# EAGLE board rev_i_v166 (EAGLE 9.7.0), part 1 of 2
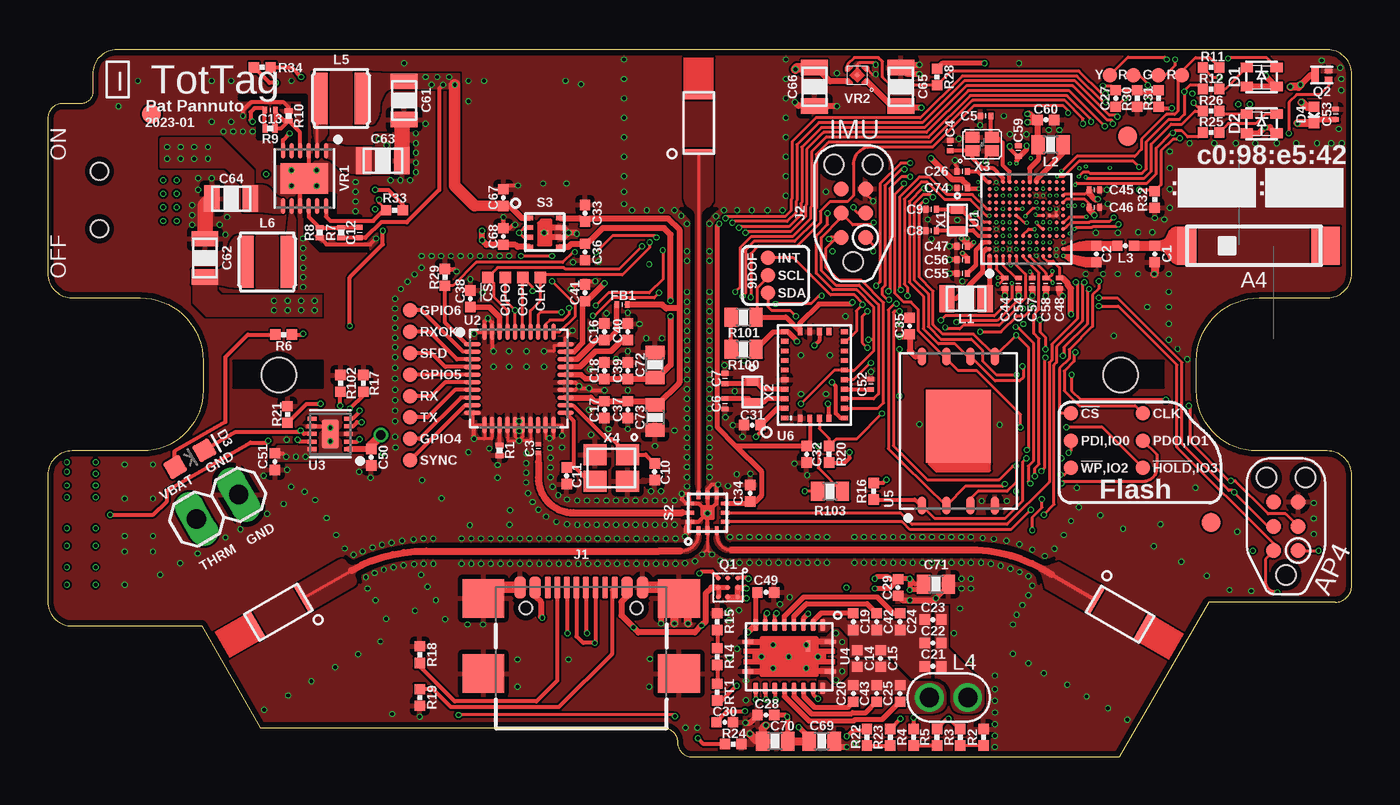
[diagram p0: board, top side]
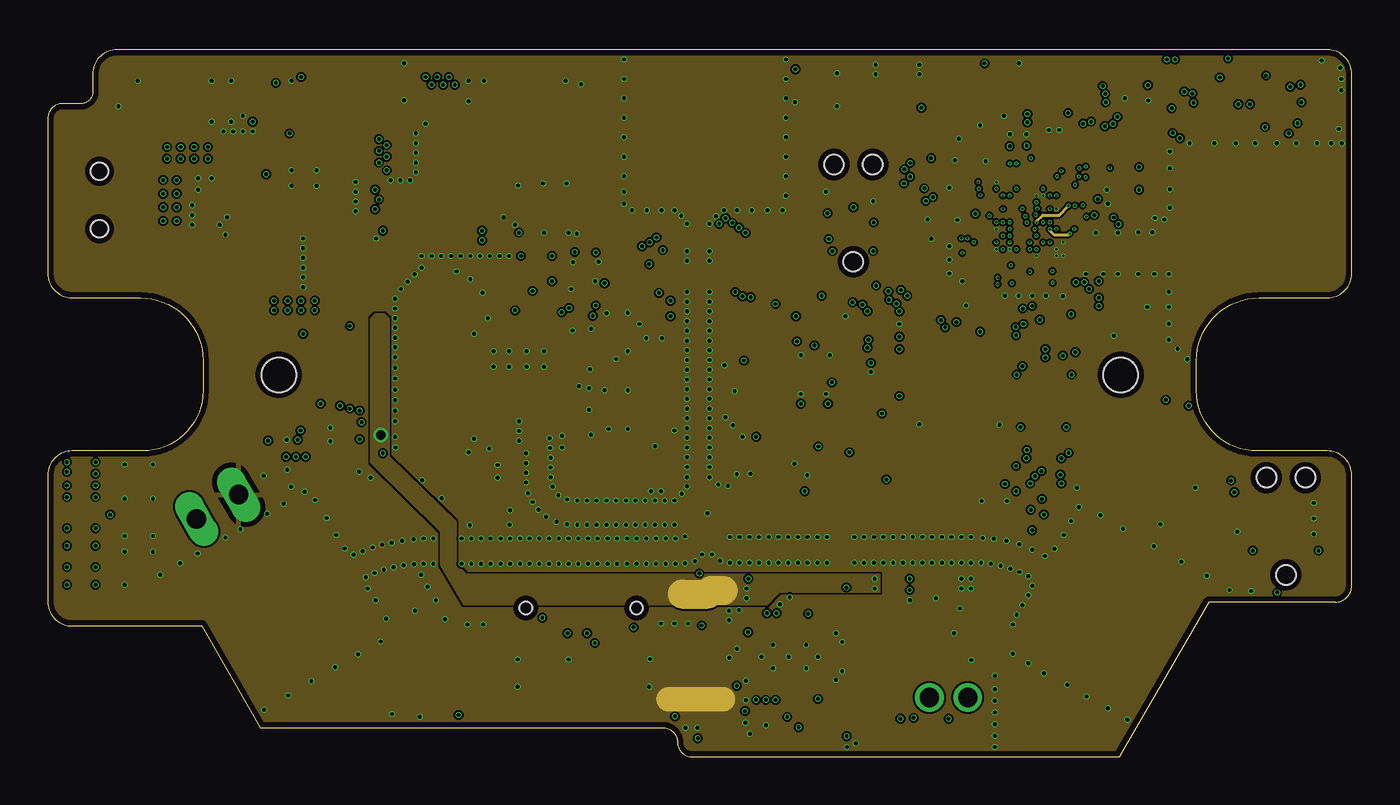
[diagram p1: board, inner layer Route2]
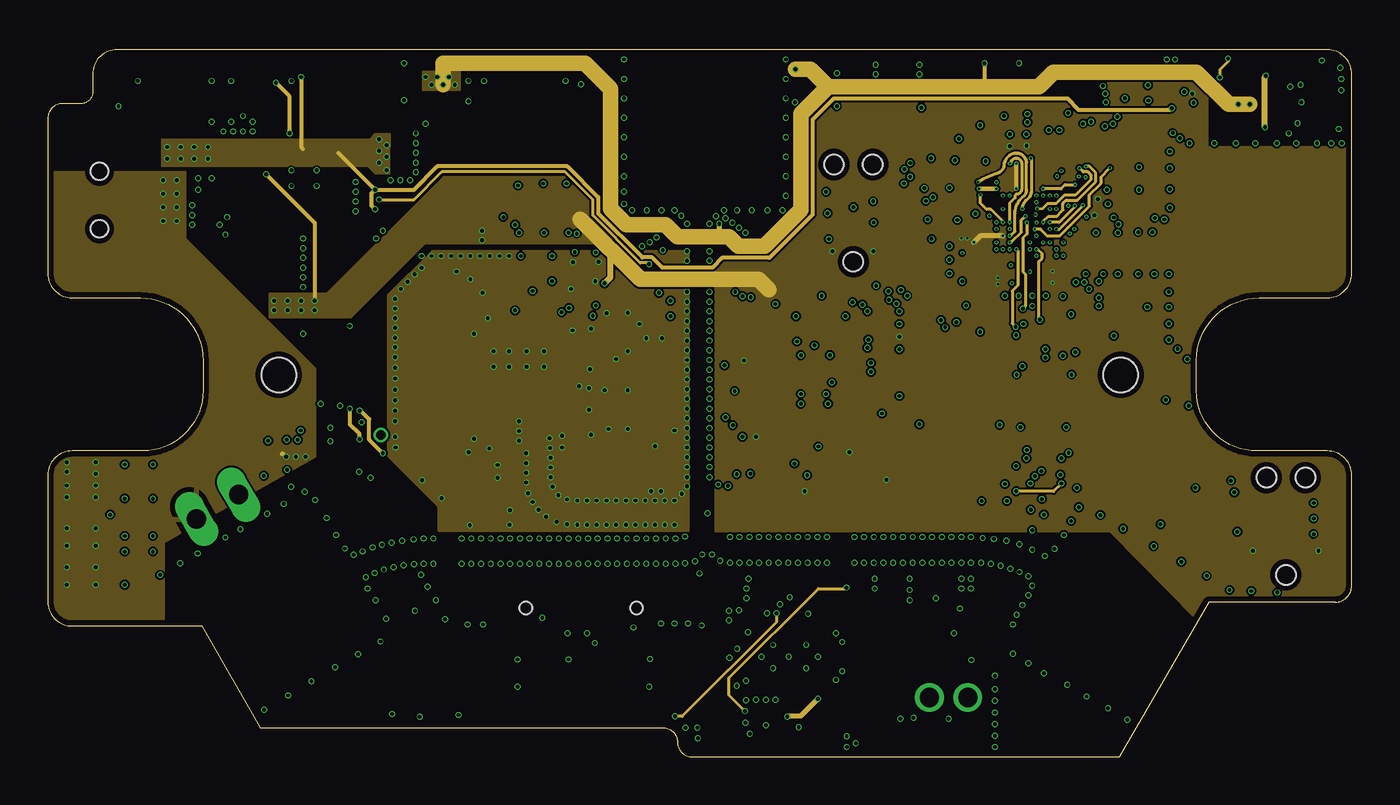
[diagram p2: board, inner layer Route15]
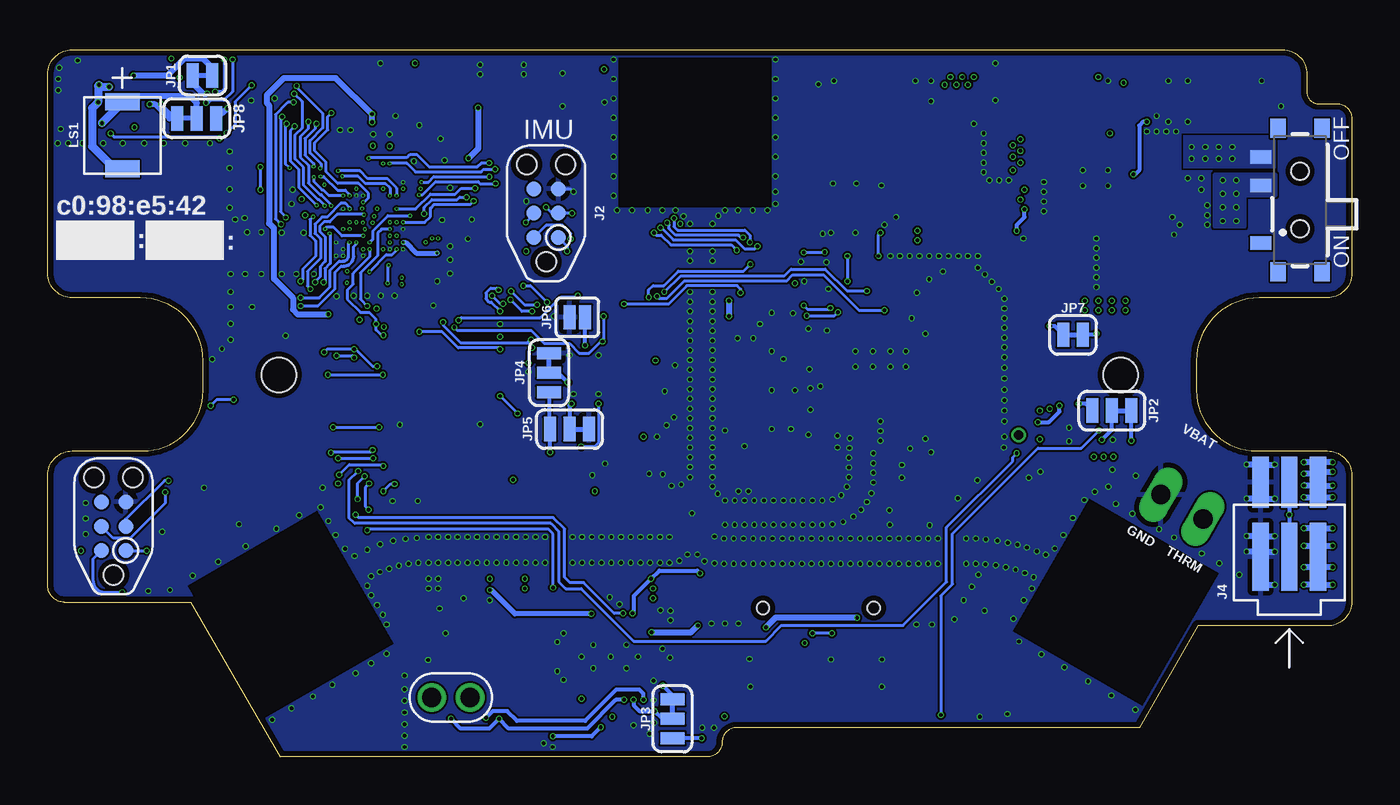
[diagram p3: board, bottom side, seen from below]

Size 68.14 x 36.93 mm. Coordinates in mm from the lower left corner, seen from the top.
Outline: 66.87,36.93 3.61,36.93 arc90 2.34,35.66 2.34,34.7 arc-90 1.76,34.12 0.76,34.12 arc90 0,33.36 0,25.25 arc90 1.27,23.98 4.83,23.98 arc-90 8.11,20.69 8.11,19.14 arc-90 4.95,15.98 1.27,15.98 arc90 0,14.71 0,8.1 arc90 1.27,6.83 8.03,6.83 11.11,1.52 32.14,1.52 arc-90 32.9,0.76 arc90 33.66,0 55.99,0 60.66,8.08 67.29,8.08 arc90 68.14,8.92 68.14,14.71 arc90 66.87,15.98 63.18,15.98 arc-90 60.02,19.14 60.02,20.69 arc-90 63.31,23.98 66.87,23.98 arc90 68.14,25.25 68.14,35.66 arc90 66.87,36.93
Copper layers (1+2*15+16): Top 0.0356mm / dielectric 0.18mm / Route2 0.0356mm / dielectric 1.03mm / Route15 0.0356mm / dielectric 0.18mm / Bottom 0.0356mm
Design rules "quickturn_co_kr_1oz_4lyr *": minimum track width 6mil, minimum drill 4mil, track to track 4mil, track to pad 4mil, pad to pad 4mil, via to via 4mil, smd to smd 4mil, copper to edge 12mil, drill to drill 9mil, minimum pad ring 8mil, minimum via ring 2mil, stop-mask expansion 3mil, vias tented up to drill 50mil, thermal gap 10mil
Holes 1.8 mm at 12.07,19.95 56.07,19.95
tKeepout: area 19.3,9.6 to 32.3,11.7; area 34.3,9.6 to 48.8,11.7; area 33.1,12.4 to 35.1,27.8
tRestrict: area 9.7,19.3 to 14.4,20.7; area 53.8,19.3 to 58.3,20.7; area 34.2,13.5 to 35,28.6; area 33.1,13.5 to 33.7,28.6; area 19.9,11 to 33.7,11.9; area 19.9,10.4 to 34.3,11.6; area 16.1,10.2 to 19.8,11.1; area 15.6,10.1 to 16,10.5; area 16.2,9.1 to 19.8,10.5; area 34.6,10.4 to 35.6,11.5; area 35.2,11.1 to 35.6,12; area 35.7,11 to 48.4,11.2; 7 more areas

## Footprints (pad centres in the part's own frame; a part is rotated, then mirrored left to right if it is on the bottom)
ACR0301U = smd 1.57 x 0.3: FEED 3.685,2.89; STRUCT-NC 3.685,5.79
AMCA72-2R470G-S1F-T = smd 2 x 1.5: NC 0,3.75 | smd 2 x 1: S1 0,-3.5
0402_CAP = smd 0.536 x 0.546: 1 -0.433,0; 2 0.433,0
0201_CAP = smd 0.3 x 0.21: P$1 0,0.22; P$2 0,-0.22
0201_CAP' = smd 0.25 x 0.35: P$1 -0.275,0; P$2 0.275,0
0805_CAP = smd 0.8 x 1.4: P$1 1,0; P$2 -1,0
0603_CAP = smd 0.7 x 1: 1 -0.65,0; 2 0.65,0
LED-0606 = smd 0.65 x 0.5: 1-C1 0.775,0.5; 2-C2 -0.775,0.5; 3-A1 0.775,-0.5; 4-A2 -0.775,-0.5
LED-0603 = smd 1 x 1: A -0.877,0; C 0.877,0
0402_DIODE = smd 0.536 x 0.546: ANODE -0.433,0; CATHODE 0.433,0
0201_FB = smd 0.25 x 0.35: P$1 -0.275,0; P$2 0.275,0
FIDUCIAL-1X2 = smd 1 x 1: 1 0,0
GCT_USB4110-GF-A = smd 0.6 x 1.15: A1/B12 -3.2,1.075; A4/B9 -2.4,1.075; B1/A12 3.2,1.075; B4/A9 2.4,1.075 | smd 0.3 x 1.15: A5 -1.25,1.075; A6 -0.25,1.075; A7 0.25,1.075; A8 1.25,1.075; B5 1.75,1.075; B6 0.75,1.075; B7 -0.75,1.075; B8 -1.75,1.075 | smd 2.18 x 2: S1 -5.11,0.5; S2 5.11,0.5; S3 -5.11,-3.43; S4 5.11,-3.43 | hole 0.65: -2.89,0; 2.89,0
TC2030-IDC-NL-2SIDE = smd 0.787 x 0.787: 1 -1.27,-0.635; 2 -1.27,0.635; 3 0,-0.635; 4 0,0.635; 5 1.27,-0.635; 6 1.27,0.635 | smd 0.787 x 0.787 bottom: B1 -1.27,0.635; B2 -1.27,-0.635; B3 0,0.635; B4 0,-0.635; B5 1.27,0.635; B6 1.27,-0.635 | hole 1.016: -2.54,0; 2.54,1.016; 2.54,-1.016
MOLEX-PICO-SPOX-3_SIDE = smd 3.55 x 0.85: 1 -1.725,1.5; 2 -1.725,0; 3 -1.725,-1.5 | smd 2.65 x 0.85: 1SUPP 2.175,1.5; 2SUPP 2.175,0; 3SUPP 2.175,-1.5
SMT-JUMPER_2_NC_TRACE_SILK = smd 0.635 x 1.27: 1 -0.508,0; 2 0.508,0
SMT-JUMPER_3_1-NC_TRACE_SILK = smd 0.635 x 1.27: 1 -1.016,0; 2 0,0; 3 1.016,0
SMT-JUMPER_2_NO_SILK = smd 0.635 x 1.27: 1 -0.406,0; 2 0.406,0
1X02 = drill 1.016 long: 1 -1.27,0; 2 1.27,0
WURTH_COIL_760308103204 = drill 1: P$1 0,1; P$2 0,-1
NRX3015 = smd 0.8 x 2.7: P$1 -1.1,0; P$2 1.1,0
SMT-0440-T-2-R = smd 0.9 x 1.8: + 1.75,0; - -1.75,0
DSBGA = smd 0.25 x 0.25: A1 -0.5,0.5; A2 0,0.5; A3 0.5,0.5; B1 -0.5,0; B2 0,0; B3 0.5,0; C1 -0.5,-0.5; C2 0,-0.5; C3 0.5,-0.5
XFDFN-3 = smd 0.4 x 0.7: D 0.35,0 | smd 0.4 x 0.25: G -0.35,0.215; S -0.35,-0.215
0201_RES = smd 0.28 x 0.43: 1 -0.255,0; 2 0.255,0
0402_RES = smd 0.536 x 0.546: 1 -0.433,0; 2 0.433,0
0603-RES = smd 0.7 x 1: 1 -0.65,0; 2 0.65,0
450404015514 = smd 0.7 x 1.1: 1 2.25,-2.05; 2 -0.75,-2.05; 3 -2.25,-2.05 | smd 1 x 0.8: Z1 -3.75,1.15; Z2 3.75,1.15; Z3 3.75,-1.15; Z4 -3.75,-1.15 | hole 0.9: -1.5,0; 1.5,0
SKY13373 = smd 0.44 x 0.2: 1 -0.93,0.48; 2 -0.93,0; 3 -0.93,-0.48; 7 0.93,-0.48; 8 0.93,0; 9 0.93,0.48 | smd 0.2 x 0.44: 4 -0.48,-0.93; 5 0,-0.93; 6 0.48,-0.93; 10 0.48,0.93; 11 0,0.93; 12 -0.48,0.93; PAD 0,0
TDFN2X2X0P6-8 = smd 0.4 x 0.24: 1 -0.8,0.75; 2 -0.8,0.25; 3 -0.8,-0.25; 4 -0.8,-0.75; 5 0.8,-0.75; 6 0.8,-0.25; 7 0.8,0.25; 8 0.8,0.75; PAD 0,0
PAD.03X.03 = smd 0.762 x 0.762: P$1 0,0
TP06SQ = smd 0.6 x 0.6: TP 0,0
APOLLO4_BLUE_SOC_BGA = smd 0.2 x 0.2: A1 -1.925,1.925; A2 -1.575,1.925; A3 -1.225,1.925; A4 -0.875,1.925; A5 -0.525,1.925; A6 -0.175,1.925; A7 0.175,1.925; A8 0.525,1.925; A9 0.875,1.925; A10 1.225,1.925; A11 1.575,1.925; A12 1.925,1.925; B1 -1.925,1.575; B2 -1.575,1.575; B3 -1.225,1.575; B4 -0.875,1.575; B5 -0.525,1.575; B6 -0.175,1.575; B7 0.175,1.575; B8 0.525,1.575; B9 0.875,1.575; B10 1.225,1.575; B11 1.575,1.575; B12 1.925,1.575; C1 -1.925,1.225; C2 -1.575,1.225; C3 -1.225,1.225; C4 -0.875,1.225; C5 -0.525,1.225; C6 -0.175,1.225; C7 0.175,1.225; C8 0.525,1.225; C9 0.875,1.225; C10 1.225,1.225; C11 1.575,1.225; C12 1.925,1.225; D1 -1.925,0.875; D2 -1.575,0.875; D3 -1.225,0.875; D4 -0.875,0.875; D5 -0.525,0.875; D6 -0.175,0.875; D7 0.175,0.875; D8 0.525,0.875; D9 0.875,0.875; D10 1.225,0.875; D11 1.575,0.875; D12 1.925,0.875; E1 -1.925,0.525; E2 -1.575,0.525; E3 -1.225,0.525; E4 -0.875,0.525; E5 -0.525,0.525; E6 -0.175,0.525; E7 0.175,0.525; E8 0.525,0.525; E9 0.875,0.525; E10 1.225,0.525; E11 1.575,0.525; E12 1.925,0.525; F1 -1.925,0.175; F2 -1.575,0.175; F3 -1.225,0.175; F4 -0.875,0.175; F9 0.875,0.175; F10 1.225,0.175; F11 1.575,0.175; F12 1.925,0.175; G1 -1.925,-0.175; G2 -1.575,-0.175; G3 -1.225,-0.175; G4 -0.875,-0.175; G9 0.875,-0.175; G10 1.225,-0.175; G11 1.575,-0.175; G12 1.925,-0.175; H1 -1.925,-0.525; H2 -1.575,-0.525; H3 -1.225,-0.525; H4 -0.875,-0.525; H9 0.875,-0.525; H10 1.225,-0.525; H11 1.575,-0.525; H12 1.925,-0.525; J1 -1.925,-0.875; J2 -1.575,-0.875; J3 -1.225,-0.875; J4 -0.875,-0.875; J5 -0.525,-0.875; J6 -0.175,-0.875; J7 0.175,-0.875; J8 0.525,-0.875; J9 0.875,-0.875; J10 1.225,-0.875; J11 1.575,-0.875; J12 1.925,-0.875; K1 -1.925,-1.225; K2 -1.575,-1.225; K3 -1.225,-1.225; K4 -0.875,-1.225; K5 -0.525,-1.225; K6 -0.175,-1.225; K7 0.175,-1.225; K8 0.525,-1.225; K9 0.875,-1.225; K10 1.225,-1.225; K11 1.575,-1.225; K12 1.925,-1.225; L1 -1.925,-1.575; L2 -1.575,-1.575; L4 -0.875,-1.575; L5 -0.525,-1.575; L6 -0.175,-1.575; L7 0.175,-1.575; L8 0.525,-1.575; L9 0.875,-1.575; L10 1.225,-1.575; L11 1.575,-1.575; L12 1.925,-1.575; M1 -1.925,-1.925; M2 -1.575,-1.925; M3 -1.225,-1.925; M4 -0.875,-1.925; M5 -0.525,-1.925; M6 -0.175,-1.925; M7 0.175,-1.925; M8 0.525,-1.925; M9 0.875,-1.925; M10 1.225,-1.925; M11 1.575,-1.925; M12 1.925,-1.925
QFN40P500X500X80-40N = smd 0.862 x 0.224: 1 -2.435,1.8; 2 -2.435,1.4; 3 -2.435,1; 4 -2.435,0.6; 5 -2.435,0.2; 6 -2.435,-0.2; 7 -2.435,-0.6; 8 -2.435,-1; 9 -2.435,-1.4; 10 -2.435,-1.8; 21 2.435,-1.8; 22 2.435,-1.4; 23 2.435,-1; 24 2.435,-0.6; 25 2.435,-0.2; 26 2.435,0.2; 27 2.435,0.6; 28 2.435,1; 29 2.435,1.4; 30 2.435,1.8 | smd 0.224 x 0.862: 11 -1.8,-2.435; 12 -1.4,-2.435; 13 -1,-2.435; 14 -0.6,-2.435; 15 -0.2,-2.435; 16 0.2,-2.435; 17 0.6,-2.435; 18 1,-2.435; 19 1.4,-2.435; 20 1.8,-2.435; 31 1.8,2.435; 32 1.4,2.435; 33 1,2.435; 34 0.6,2.435; 35 0.2,2.435; 36 -0.2,2.435; 37 -0.6,2.435; 38 -1,2.435; 39 -1.4,2.435; 40 -1.8,2.435
DSQ0010A = smd 0.5 x 0.2: 1 -0.95,0.8; 2 -0.95,0.4; 3 -0.95,0; 4 -0.95,-0.4; 5 -0.95,-0.8; 6 0.95,-0.8; 7 0.95,-0.4; 8 0.95,0; 9 0.95,0.4; 10 0.95,0.8 | smd 0.9 x 1.5: PAD 0,0
RHL0020A = smd 0.24 x 0.6: 1 -0.775,2.15; 10 -0.775,-2.15; 11 0.775,-2.15; 20 0.775,2.15 | smd 0.6 x 0.24: 2 -1.65,1.75; 3 -1.65,1.25; 4 -1.65,0.75; 5 -1.65,0.25; 6 -1.65,-0.25; 7 -1.65,-0.75; 8 -1.65,-1.25; 9 -1.65,-1.75; 12 1.65,-1.75; 13 1.65,-1.25; 14 1.65,-0.75; 15 1.65,-0.25; 16 1.65,0.25; 17 1.65,0.75; 18 1.65,1.25; 19 1.65,1.75; PAD -0.55,1
WSON127P800X600X80-9T430X340N = smd 0.94 x 0.445: 1 -3.896,1.905; 2 -3.896,0.635; 3 -3.896,-0.635; 4 -3.896,-1.905; 5 3.896,-1.905; 6 3.896,-0.635; 7 3.896,0.635; 8 3.896,1.905 | smd 3.8 x 3.4: PAD 0.25,0
LGA28R0P510X4_5P2X3P8X1 = smd 0.25 x 0.375: 1 -2.25,1.562; 6 -2.25,-1.562; 7 -1.75,-1.562; 8 -1.25,-1.562; 9 -0.75,-1.562; 10 -0.25,-1.562; 11 0.25,-1.562; 12 0.75,-1.562; 13 1.25,-1.562; 14 1.75,-1.562; 15 2.25,-1.562; 20 2.25,1.562; 21 1.75,1.562; 22 1.25,1.562; 23 0.75,1.562; 24 0.25,1.562; 25 -0.25,1.562; 26 -0.75,1.562; 27 -1.25,1.562; 28 -1.75,1.562 | smd 0.375 x 0.25: 2 -2.263,0.75; 3 -2.263,0.25; 4 -2.263,-0.25; 5 -2.263,-0.75; 16 2.263,-0.75; 17 2.263,-0.25; 18 2.263,0.25; 19 2.263,0.75
SON45P300X300X80-13T160X250N = smd 0.813 x 0.224: 1 -1.445,1.125; 2 -1.445,0.675; 3 -1.445,0.225; 4 -1.445,-0.225; 5 -1.445,-0.675; 6 -1.445,-1.125; 7 1.445,-1.125; 8 1.445,-0.675; 9 1.445,-0.225; 10 1.445,0.225; 11 1.445,0.675; 12 1.445,1.125 | smd 1.6 x 2.5: 13 0,0
4-XDFN-EP = smd 0.21 x 0.21: 1 -0.505,0.325; 2 -0.505,-0.325; 3 0.505,-0.325; 4 0.505,0.325 | smd 0.2 x 0.2 rotated 45: PAD 0,0
TXC-9HT12 = smd 0.4 x 0.6: 1 -0.53,0 | smd 0.4 x 0.86: 2 0.53,0
ABM12W = smd 0.73 x 0.58: 1 -0.5,-0.35; 2 0.5,-0.35; 3 0.5,0.35; 4 -0.5,0.35
FA-20H = smd 1.1 x 1.2: 1 -0.7,0.85; 2 -0.7,-0.85; 3 0.7,-0.85; 4 0.7,0.85

## Placement (x,y rotation side)
A1  ACR0301U  [ACR0301U]  30.32,28.71 0 top
A2  ACR0301U  [ACR0301U]  54.07,12.84 240 top
A3  ACR0301U  [ACR0301U]  17.71,6.55 120 top
A4  AMCA72-2R47G-S1F-T  [AMCA72-2R470G-S1F-T]  63.02,26.7 270 top
C1  0.5pF  [0402_CAP]  57.84,26.26 270 top
C2  0.8pF  [0402_CAP]  54.79,26.26 270 top
C3  2pF  [0201_CAP]  25.64,16.1 0 top
C4  4pF  [0201_CAP']  47.15,31.93 90 top
C5  4pF  [0201_CAP']  49,33.48 180 top
C6  4pF  [0201_CAP']  35.39,18.44 90 top
C7  4pF  [0201_CAP']  35.39,19.76 270 top
C8  6pF  [0201_CAP']  46.16,27.48 180 top
C9  6pF  [0201_CAP']  46.16,28.6 180 top
C10  12pF  [0402_CAP]  31.71,14.88 270 top
C11  12pF  [0402_CAP]  27.11,14.68 270 top
C12  22pF  [0201_CAP']  16.29,27.38 90 top
C13  22pF  [0201_CAP']  11.61,33.78 180 top
C14  470pF  [0402_CAP]  42.3,5.13 270 top
C15  470pF  [0402_CAP]  43.52,5.13 270 top
C16  4.7nF  [0402_CAP]  29.09,22.2 90 top
C17  4.7nF  [0402_CAP]  29.09,18.14 270 top
C18  4.7nF  [0402_CAP]  29.09,20.17 90 top
C19  10nF  [0402_CAP]  42.09,7.06 270 top
C20  10nF  [0402_CAP]  42.09,3.3 90 top
C21  22nF  [0402_CAP]  46.26,4.72 0 top
C22  22nF  [0402_CAP]  46.26,5.94 0 top
C23  22nF  [0402_CAP]  46.26,7.16 0 top
C24  22nF  [0402_CAP]  44.53,7.06 270 top
C25  22nF  [0402_CAP]  44.53,3.3 90 top
C26  0.1uF  [0201_CAP']  47.78,30.58 180 top
C27  0.1uF  [0402_CAP]  55.81,34.39 270 top
C28  0.1uF  [0402_CAP]  37.52,2.18 180 top
C29  0.1uF  [0402_CAP]  44.43,8.84 270 top
C30  0.1uF  [0402_CAP]  35.38,1.8 0 top
C31  0.1uF  [0402_CAP]  36.81,17.32 180 top
C32  0.1uF  [0402_CAP]  39.66,15.8 270 top
C33  0.1uF  [0402_CAP]  28.07,28.4 90 top
C34  0.1uF  [0402_CAP]  36.71,13.77 90 top
C35  0.1uF  [0402_CAP]  45.04,22.5 90 top
C36  0.1uF  [0402_CAP]  28.07,26.37 270 top
C37  0.1uF  [0402_CAP]  30.31,18.14 270 top
C38  0.1uF  [0402_CAP]  22.08,23.93 90 top
C39  0.1uF  [0402_CAP]  30.31,20.17 90 top
C40  0.22uF  [0402_CAP]  30.31,22.2 90 top
C41  0.22uF  [0402_CAP]  28.07,24.23 90 top
C42  0.47uF  [0402_CAP]  43.31,7.06 270 top
C43  0.47uF  [0402_CAP]  43.31,3.3 90 top
C44  1uF  [0201_CAP']  50.02,24.74 270 top
C45  1uF  [0201_CAP']  54.69,29.62 0 top
C46  1uF  [0201_CAP']  54.69,28.7 0 top
C47  1uF  [0201_CAP']  47.78,26.67 180 top
C48  1uF  [0201_CAP']  52.86,24.74 270 top
C49  1uF  [0402_CAP]  37.52,8.59 180 top
C50  1uF  [0402_CAP]  16.9,15.65 270 top
C51  1uF  [0402_CAP]  11.87,15.42 270 top
C52  1uF  [0201_CAP']  43.01,19.46 90 top
C53  1uF  [0201_CAP']  67.3,33.56 90 top
C54  2.2uF  [0201_CAP']  50.73,24.74 270 top
C55  2.2uF  [0201_CAP']  47.78,25.25 180 top
C56  2.2uF  [0201_CAP']  47.78,25.96 180 top
C57  2.2uF  [0201_CAP']  51.44,24.74 270 top
C58  2.2uF  [0201_CAP']  52.15,24.74 270 top
C59  2.2uF  [0201_CAP']  50.72,31.65 90 top
C60  4.7uF  [0402_CAP]  52.15,33.27 0 top
C61  4.7uF  [0805_CAP]  18.62,34.29 270 top
C62  4.7uF  [0805_CAP]  8.21,26.06 270 top
C63  4.7uF  [0805_CAP]  17.51,31.14 180 top
C64  4.7uF  [0805_CAP]  9.58,29.16 180 top
C65  4.7uF  [0805_CAP]  44.58,35 270 top
C66  4.7uF  [0805_CAP]  40.06,35 90 top
C67  4.7uF  [0402_CAP]  23.81,29.21 270 top
C68  4.7uF  [0402_CAP]  23.81,27.18 270 top
C69  10uF  [0603_CAP]  40.44,0.81 0 top
C70  10uF  [0603_CAP]  38,0.81 180 top
C71  10uF  [0603_CAP]  46.41,9.02 0 top
C72  10uF  [0603_CAP]  31.73,20.47 90 top
C73  10uF  [0603_CAP]  31.73,17.73 270 top
C74  1uF  [0201_CAP']  47.78,29.72 180 top
D1  BICOLOR-SMD  [LED-0606]  63.43,35.51 0 top
D2  BICOLOR-SMD  [LED-0606]  63.43,33.07 0 top
D3  GREEN  [LED-0603]  7.42,15.58 30 top
D4  DIODE0402  [0402_DIODE]  66.17,33.53 270 top
FB1  BLM03PG330SN1D  [0201_FB]  30,23.62 180 top
FD1  FIDUCIAL1X2  [FIDUCIAL-1X2]  5.42,33.58 0 top
FD2  FIDUCIAL1X2  [FIDUCIAL-1X2]  56.44,32.42 0 top
FD3  FIDUCIAL1X2  [FIDUCIAL-1X2]  60.79,12.24 0 top
J1  USB4110-GF-A  [GCT_USB4110-GF-A]  27.87,7.77 0 top
J2  TC2030-JLINK-NL-2SIDE  [TC2030-IDC-NL-2SIDE]  42.09,28.4 90 top
J3  TC2030-JLINK-NL-2SIDE  [TC2030-IDC-NL-2SIDE]  64.7,12.04 90 top
J4  MOLEX-PICO-SPOX-3SIDE  [MOLEX-PICO-SPOX-3_SIDE]  3.26,12.17 90 bottom
JP1  JUMPER-SMT_2_NC_TRACE_SILK  [SMT-JUMPER_2_NC_TRACE_SILK]  60.05,35.59 180 bottom
JP2  JUMPER-SMT_3_1-NC_TRACE_SILK  [SMT-JUMPER_3_1-NC_TRACE_SILK]  12.53,18.08 0 bottom
JP3  JUMPER-SMT_3_1-NC_TRACE_SILK  [SMT-JUMPER_3_1-NC_TRACE_SILK]  35.49,1.98 90 bottom
JP4  JUMPER-SMT_3_1-NC_TRACE_SILK  [SMT-JUMPER_3_1-NC_TRACE_SILK]  41.94,20.07 90 bottom
JP5  JUMPER-SMT_3_1-NC_TRACE_SILK  [SMT-JUMPER_3_1-NC_TRACE_SILK]  40.88,17.12 0 bottom
JP6  JUMPER-SMT_2_NO_SILK  [SMT-JUMPER_2_NO_SILK]  40.47,22.96 0 bottom
JP7  JUMPER-SMT_2_NC_TRACE_SILK  [SMT-JUMPER_2_NC_TRACE_SILK]  14.56,22.05 0 bottom
JP8  JUMPER-SMT_3_1-NC_TRACE_SILK  [SMT-JUMPER_3_1-NC_TRACE_SILK]  60.36,33.35 180 bottom
JP9  [1X02]  8.87,13.06 30 top
L1  2.2µH  [0805_CAP]  47.99,23.93 0 top
L2  1.0µH  [0603_CAP]  52.41,31.98 180 top
L3  4.7nH  [0402_CAP]  56.32,26.7 180 top
L4  WURTH_COIL_760308103204  [WURTH_COIL_760308103204]  47.07,3.1 270 top
L5  10uH  [NRX3015]  15.32,34.39 0 top
L6  10uH  [NRX3015]  11.46,25.86 0 top
LS1  PUI_SMT-0440-T-2-R  [SMT-0440-T-2-R]  64.24,32.46 90 bottom
Q1  CSD75207W15  [DSBGA]  35.54,8.84 270 top
Q2  MOSFET-NCHANNELXFDN-3  [XFDFN-3]  66.58,35.61 180 top
R1  49.9-1%  [0201_RES]  23.6,16 270 top
R2  97.6  [0402_RES]  48.9,1.02 90 top
R3  97.6  [0402_RES]  47.68,1.02 270 top
R4  162  [0402_RES]  45.24,1.02 270 top
R5  162  [0402_RES]  46.46,1.02 90 top
R6  1k  [0402_RES]  12.33,22.05 180 top
R7  845k  [0201_RES]  15.32,27.38 270 top
R8  422k  [0201_RES]  14.21,27.38 90 top
R9  845k  [0201_RES]  11.61,32.82 0 top
R10  261k  [0201_RES]  12.58,33.48 270 top
R11  15  [0402_RES]  60.79,36.02 0 top
R12  5.1  [0402_RES]  60.79,34.87 180 top
R14  1k  [0402_RES]  34.98,5.23 270 top
R15  1k  [0402_RES]  34.98,7.06 270 top
R16  10k  [0402_RES]  43.16,13.87 90 top
R17  2.2k  [0402_RES]  16.49,19.51 270 top
R18  5.1k  [0402_RES]  19.44,5.33 90 top
R19  5.1k  [0402_RES]  19.44,3.1 270 top
R20  10k  [0402_RES]  40.82,15.8 270 top
R21  10k  [0402_RES]  12.53,17.88 270 top
R22  10k  [0402_RES]  42.81,1.02 270 top
R23  10k  [0402_RES]  44.02,1.02 90 top
R24  10k  [0402_RES]  35.82,0.66 180 top
R25  15  [0402_RES]  60.79,32.61 180 top
R26  5.1  [0402_RES]  60.79,33.73 180 top
R28  100k  [0402_RES]  46.46,35.51 270 top
R29  100k  [0402_RES]  20.76,25.04 270 top
R30  3.3M  [0402_RES]  56.93,34.39 90 top
R31  5.1M  [0402_RES]  58.05,34.39 270 top
R32  100k  [0402_RES]  57.84,29.11 270 top
R33  5.1M  [0402_RES]  18.12,28.55 180 top
R34  5.1M  [0402_RES]  11.21,36.02 180 top
R100  DNP  [0603-RES]  36.35,21.29 0 top
R101  DNP  [0603-RES]  36.35,22.96 0 top
R102  DNP  [0402_RES]  15.3,19.51 270 top
R103  DNP  [0603-RES]  40.88,13.87 180 top
RT1  10k@25C  [0402_RES]  34.98,3.38 270 top
S1  [450404015514]  2.7,29.08 270 bottom
S2  SKY13373  [SKY13373]  34.47,12.75 90 top
S3  SIP3241XSIP32414  [TDFN2X2X0P6-8]  25.96,27.39 0 top
TP0  TEST-POINT  [PAD.03X.03]  18.93,22.2 0 top
TP1  TEST-POINT  [PAD.03X.03]  18.93,21.08 0 top
TP2  TEST-POINT  [PAD.03X.03]  18.93,18.82 0 top
TP3  TEST-POINT  [PAD.03X.03]  18.93,17.73 0 top
TP4  TEST-POINT  [PAD.03X.03]  18.93,16.61 0 top
TP5  TEST-POINT  [PAD.03X.03]  18.93,19.96 0 top
TP6  TEST-POINT  [PAD.03X.03]  18.93,23.32 0 top
TP7  TEST-POINT  [PAD.03X.03]  18.93,15.49 0 top
TP8  TEST-POINT  [PAD.03X.03]  53.47,17.93 0 top
TP9  TEST-POINT  [PAD.03X.03]  57.23,17.93 0 top
TP10  TEST-POINT  [PAD.03X.03]  58.05,35.61 0 top
TP11  TEST-POINT  [PAD.03X.03]  56.72,35.61 0 top
TP12  TEST-POINT  [PAD.03X.03]  55.51,35.61 0 top
TP13  TEST-POINT  [PAD.03X.03]  53.47,16.51 0 top
TP14  TEST-POINT  [PAD.03X.03]  57.23,16.51 0 top
TP15  TEST-POINT  [PAD.03X.03]  53.47,15.09 0 top
TP16  TEST-POINT  [PAD.03X.03]  57.23,15.09 0 top
TP17  TEST-POINT  [PAD.03X.03]  37.62,26.06 0 top
TP18  TEST-POINT  [PAD.03X.03]  37.62,25.15 0 top
TP19  TEST-POINT  [PAD.03X.03]  37.62,24.23 0 top
TP20  TEST-POINT  [PAD.03X.03]  59.26,35.61 0 top
TP_DW_CIPO  TPTP06SQ  [TP06SQ]  23.91,25.04 0 top
TP_DW_COPI  TPTP06SQ  [TP06SQ]  24.82,25.04 0 top
TP_DW_SPI_CLK  TPTP06SQ  [TP06SQ]  25.74,25.04 0 top
TP_DW_SPI_CS  TPTP06SQ  [TP06SQ]  22.99,25.04 0 top
U1  APOLLO4_BLUE_SOC_BGA  [APOLLO4_BLUE_SOC_BGA]  51.14,28.09 90 top
U2  DW3210  [QFN40P500X500X80-40N]  24.62,19.76 0 top
U3  BQ24040  [DSQ0010A]  14.76,16.87 180 top
U4  BQ51013B  [RHL0020A]  38.74,5.23 270 top
U5  W25N01GWZEIG  [WSON127P800X600X80-9T430X340N]  47.58,17.02 90 top
U6  BNO055  [LGA28R0P510X4_5P2X3P8X1]  40.07,19.95 90 top
VR1  RT8020RT8020GQW  [SON45P300X300X80-13T160X250N]  13.41,30.21 270 top
VR2  TPS7A0218PDQNR  [4-XDFN-EP]  42.3,35.61 180 top
X1  TXC-9HT12  [TXC-9HT12]  47.53,28.04 270 top
X2  TXC-9HT12  [TXC-9HT12]  36.81,19.05 270 top
X3  ABM12W  [ABM12W]  48.83,32 0 top
X4  38.4MHz  [FA-20H]  29.45,15.09 270 top

## Library data of the parts
A1-A3 = antennas; MANUFACTURER: Abracon; MPN: ACR0301U
A4 = antennas; DESCRIPTION: RF ANT 2.4GHZ CHIP SOLDER SMD; DIGIKEY: 535-14108-1-ND; MPN: AMCA72-2R470G-S1F-T4
C1 = passives; MPN: GJM1555C1HR50WB01D
C2 = passives; MPN: GJM1555C1HR80WB01D
C3 = passives; MPN: CBR02C209A5GAC
C4-C7 = passives; MANUFACTURER: Murata; MPN: GRM0335C1H4R0BA01D
C8 C9 = passives; MANUFACTURER: Murata; MPN: GRM0335C1H6R0BA01D
C10 C11 = passives; DIGIKEY: 399-8815-2-ND; MPN: CBR04C120F5GAC
C12 C13 = passives; MPN: GRM0335C1H220FA01D
C14 C15 = passives; DESCRIPTION: CAP CER 470PF 50V C0G/NP0 0402; DIGIKEY: 490-6242-1-ND; MANUFACTURER: Murata; MPN: GRM1555C1H471JA01J
C16-C18 = passives; MPN: C0402C472K3RAC7867
C19 C20 = passives; DIGIKEY: 490-6351-2-ND; MPN: GRM155R71H103KA88J
C21-C23 = passives; DIGIKEY: 490-10699-2-ND; MPN: GRM155R71E223JA61D
C24 C25 = passives; DIGIKEY: 311-3823-1-ND; MPN: CC0402ZRY5V8BB223
C26 C31-C39 = passives; MPN: CL05A104KP5NNNC
C27-C30 = passives; DIGIKEY: 490-6328-1-ND; MPN: GRM155R71C104KA88J
C40 C41 = passives; MPN: CL05A224KP5NNNC
C42 C43 = passives; DIGIKEY: 490-12270-1-ND; MPN: GRT155R61E474ME01D
C44-C48 C52 C53 C74 = passives; MANUFACTURER: Murata; MPN: GRM033R61A105ME44D
C49-C51 = passives; DIGIKEY: 490-7195-1-ND; MPN: GRM155R70G105KA12D
C54-C59 = passives; MANUFACTURER: Murata; MPN: GRM033R61A225KE47D
C60 C67 C68 = passives; MPN: CL05A475MP5NRNC
C61-C66 = passives; MANUFACTURER: Taiyo Yuden; MPN: JMK212ABJ475MGHT
C69-C73 = passives; DIGIKEY: 1253-CM105X5R106M25ATCT-ND; MPN: CM105X5R106M25AT
D1 = leds; MPN: MCL0606FRD1GR1T
D2 = leds; MPN: MCL0606FYW1RD1T
D3 = SparkFun-LED; DIGIKEY: 160-1446-1-ND; MPN: LTST-C191KGKT
D4 = passives; DIGIKEY: 641-2087-1-ND; MPN: CDSQR400B-HF
FB1 = passives; MANUFACTURER: Murata; MPN: BLM03PG330SN1D
FD1-FD3 = SparkFun-Aesthetics
J1 = connector; DESCRIPTION: USB-C (USB TYPE-C) USB 2.0 Receptacle Connector 24 (16+8 Dummy) Position Surface Mount, Right Angle; Through Hole; DIGIKEY: 2073-USB4110-GF-A-1-ND; MF: GCT; MPN: USB4110-GF-A; PACKAGE: None
J2 J3 = connector
J4 = connector; DIGIKEY: WM7647CT-ND; MFN: 874380343
JP1-JP8 = SparkFun-Jumpers
JP9 = pinhead
L1 = passives; MANUFACTURER: Murata; MPN: DFE201210U-2R2M=P2
L2 = passives; MANUFACTURER: Murata; MPN: DFE18SAN1R0ME0L
L3 = passives; MPN: LQW15AN4N7G8ZD
L4 = ac; DIGIKEY: 732-5258-ND; MANUFACTURER: Würth Elektronik; MPN: 760308103204
L5 L6 = passives; MANUFACTURER: TAIYO YUDEN; MPN: NR3015T100M
LS1 = audio; DIGIKEY: 668-SMT-0440-T-2-RTR-ND; MPN: SMT-0440-T-2-R
Q1 = fets; DIGIKEY: 296-40008-1-ND; MANUFACTURER: TEXAS INSTRUMENTS; MPN: CSD75207W15
Q2 = fets; DIGIKEY: DMN2400UFB4-7DICT-ND
R1 = passives; MPN: ERJ-1GNF49R9C
R2 R3 = passives; DIGIKEY: RMCF0402FT97R6CT-ND; MPN: RMCF0402FT97R6
R4 R5 = passives; DIGIKEY: RMCF0402FT162RCT-ND; MPN: RMCF0402FT162R
R6 R14 R15 R100-R103 = passives
R7 R9 = passives; MPN: ERJ-1GNF8453C
R8 = passives; MPN: ERJ-1GNF4223C
R10 = passives; MPN: ERJ-1GNF2613C
R11 R25 = passives; MPN: RC0402JR-0715RL
R12 R26 = passives; MPN: RC0402JR-075R1L
R16 R20-R24 = passives; DIGIKEY: 311-10KJRCT-ND; MPN: RC0402JR-0710KL
R17 = passives; DIGIKEY: RMCF0402JT2K20CT-ND; MPN: RMCF0402JT2K20
R18 R19 = passives; DIGIKEY: RMCF0402FT5K10CT-ND; MPN: RMCF0402FT5K10
R28 R29 R32 = passives; MPN: RT0402BRE07100KL
R30 = passives; DIGIKEY: RMCF0402FT3M30CT-ND; MPN: RMCF0402FT3M30
R31 R33 R34 = passives; DIGIKEY: RMCF0402FT5M10CT-ND; MPN: RMCF0402FT5M10
RT1 = passives; DIGIKEY: 490-18149-1-ND; MPN: NCU15XH103F60RC
S1 = Wurth_Switch_WS-SLSU; DATASHEET-URL: https://www.we-online.com/catalog/datasheet/450404015514.pdf; DIGIKEY: 732-13665-1-ND; IR: 300mA; PACKAGING: Tape and Reel; PART-NUMBER: 450404015514; QTY: 150; VR: 5V(DC)
S2 = switches; MANUFACTURER: Skyworks; MPN: SKY13373-460LF
S3 = switches; MANUFACTURER: Vishay; MPN: SIP32414DNP-T1-GE4
TP0 TP1-TP20 = headers
TP_DW_CIPO TP_DW_COPI TP_DW_SPI_CLK TP_DW_SPI_CS = testpad
U1 = Quorvo; MANUFACTURER: ambiq; MPN: AMA4B2KK-KBR
U2 = Quorvo; MANUFACTURER: Qorvo; MPN: DW3210
U3 = chips; DIGIKEY: 296-37142-1-ND; MPN: BQ24040DSQR
U4 = chips; DIGIKEY: 296-38885-1-ND; MPN: BQ51013BRHLR
U5 = Quorvo; MANUFACTURER: Winbond; MPN: W25N01GWZEIG
U6 = Quorvo; MANUFACTURER: Bosch Scientific; MPN: BNO055
VR1 = regulators; MANUFACTURER: RichTek; MPN: RT8020GQW
VR2 = regulators; MPN: TPS7A0218PDQNR
X1 X2 = crystals; C-LOAD: 7pF; FREQUENCY: 32.768 kHz; MANUFACTURER: TXC Corp; MPN: 9HT12-32.768KDZY-T
X3 = crystals; C-LOAD: 6pF; FREQUENCY: 32 MHz; MANUFACTURER: Abracon; MAX-ESR: 80Ω; MPN: ABM12W-32.0000MHZ-6-D1X-T3
X4 = crystals; DATASHEET: https://support.epson.biz/td/api/doc_check.php?dl=brief_FA-20H_en.pdf; DESCRIPTION: 38.4MHz ±10ppm Crystal 8.5pF 40 Ohms 4-SMD, No Lead; DIGIKEY: SER3631CT-ND; MANUFACTURER: EPSON; MPN: FA-20H 38.4000MF10Z-AS3

## Nets
9DOF_!BOOT_LOAD_PIN: R20.1 U1.D5 U6.4
9DOF_!RESET: J2.3 J2.B3 R103.1 U1.E1 U6.11
9DOF_BL_IND: U1.D6 U6.10
9DOF_CAP: C52.P$1 U6.9
9DOF_INT: TP17.P$1 U1.D4 U6.14
9DOF_SCL-COM1: R101.2 TP18.P$1 U1.E8 U6.19
9DOF_SDA-COM0: R100.2 TP19.P$1 U1.E7 U6.20
9DOF_SWCLK: J2.4 J2.B4 U6.8
9DOF_SWDIO: J2.2 J2.B2 U6.7
9DOF_XI: C6.P$2 U6.27 X2.2
9DOF_XO: C7.P$2 U6.26 X2.1
!AD_EN: Q1.A1 Q1.C1 U4.8
!CHG: D3.C U1.J7 U3.8 U4.7
!DW_RST: U1.D1 U2.33
!DW_SPI_CS: TP_DW_SPI_CS.TP U1.F4 U2.37
!PG: U1.K8 U3.5
+1V8: C13.P$2 C31.1 C35.1 C41.1 C44.P$1 C45.P$1 C46.P$1 C47.P$1 C58.P$1 C59.P$1 C62.P$1 C68.2 J2.1 J2.B1 J3.1 J3.B1 JP1.2 JP4.1 JP5.1 L6.P$1 R9.1 R16.2 R20.2 R100.1 R101.1 R103.2 S3.4 U1.B1 U1.C4 U1.E11 U1.G1 U1.M9 U1.M10 U2.29 U5.8 U6.28
+2V5: C12.P$1 C32.1 C34.1 C61.P$2 C66.P$1 C67.2 JP8.3 L5.P$2 R7.2 R28.1 S2.6 S3.1 U6.3 VR2.4
AP4_!RESET: J3.3 J3.B3 U1.A6
AP4_LED1_GREEN: R12.2 TP10.P$1 U1.K10
AP4_LED1_RED: R11.2 TP20.P$1 U1.C10
AP4_LED2_BLUE_COMM: D1.1-C1 R11.1
AP4_LED2_RED: R25.2 TP11.P$1 U1.J11
AP4_LED2_YELLOW: R26.2 TP12.P$1 U1.L10
AP4_LED_BLUE_COMM: D2.2-C2 R26.1
AP4_LED_GREEN_COMM: D2.1-C1 R25.1
AP4_LED_RED_COMM: D1.2-C2 R12.1
AP4_LPADC_VREF: C26.P$1 U1.A12
AP4_RFIOP: C2.1 L3.2 U1.M2
AP4_SWDCLK: J3.4 J3.B4 U1.K3
AP4_SWDIO: J3.2 J3.B2 U1.J3
AP4_VDDBH: C48.P$1 C60.1 L2.2 U1.G12 U1.J1
AP4_VDDBH_SW: L2.1 U1.H12
AP4_VDDC: C55.P$1 U1.A3
AP4_VDDC_LV: C56.P$1 U1.B3
AP4_VDDF: C57.P$1 U1.C2
AP4_VDDS: C54.P$1 U1.C1
AP4_XI: C8.P$1 U1.A4 X1.2
AP4_XI32M: C4.P$1 U1.C12 X3.1
AP4_XO: C9.P$1 U1.A5 X1.1
AP4_XO32M: C5.P$1 U1.D12 X3.3
BATIN: C27.1 R30.2 R31.1 U1.D3
BATT_THERM: J4.2 J4.2SUPP JP2.3
BATT_TS: JP2.2 U3.9
BLE_ANT_FEED: A4.S1 C1.1 L3.1
BQ_AC1: C14.1 C15.1 C19.2 C21.1 C22.1 C23.1 C24.2 C42.2 U4.2
BQ_AC2: C14.2 C15.2 C20.2 C25.2 C43.2 L4.P$2 U4.19
BQ_BOOT1: C19.1 U4.3
BQ_BOOT2: C20.1 U4.17
BQ_CLAMP1: C42.1 U4.5
BQ_CLAMP2: C43.1 U4.16
BQ_COMM1: C24.1 U4.6
BQ_COMM2: C25.1 U4.15
BQ_FOD: R3.1 R5.2 R23.2 U4.14
BQ_ILM: R4.1 U4.12
BQ_ISET: R17.2 U3.2
BQ_RECT: C28.1 C69.1 C70.1 R22.1 U4.18
BUZZER_GATE: Q2.G R32.1 U1.D10
BUZZER_SUPPLY: C53.P$1 D4.CATHODE JP8.2 LS1.+
COIL_AC1: C21.2 C22.2 C23.2 L4.P$1
D+: J1.A6 J1.B6
D-: J1.A7 J1.B7
DW_EXTON: S3.2 S3.3 U2.31
DW_GPIO4: TP4.P$1 U2.8
DW_GPIO5: TP5.P$1 U2.5
DW_GPIO6: TP6.P$1 U2.2
DW_IRQ: R29.2 U1.M5 U2.1
DW_RF1: C3.P$1 U2.18
DW_RF2: R1.1 U2.13
DW_RXLED: TP2.P$1 U2.6
DW_RXOKLED: TP0.P$1 U2.3
DW_SFDLED: TP1.P$1 U2.4
DW_SPI_CIPO: TP_DW_CIPO.TP U1.J6 U2.36
DW_SPI_CLK: TP_DW_SPI_CLK.TP U1.H4 U2.34
DW_SPI_COPI: TP_DW_COPI.TP U1.J5 U2.35
DW_SYNC: TP7.P$1 U2.9
DW_TXLED: TP3.P$1 U2.7
DW_VDD2_SUP: C17.1 C33.1 C37.1 C73.1 FB1.P$1 S3.8 U2.23
DW_VDD2A: C16.1 FB1.P$2 U2.28
DW_VDD3_SUP: C18.1 C36.1 C39.1 C72.1 S3.5 U2.26
DW_VIO_D: C38.1 U2.38
DW_VTX_D: C40.1 U2.27
DW_WAKEUP: U1.L5 U2.32
DW_XTI: C11.1 U2.21 X4.3
DW_XTO: C10.1 U2.22 X4.1
FLASH_!CS: R16.1 TP8.P$1 U1.M6 U5.1
FLASH_!HOLD!-IO3: TP16.P$1 U1.C6 U5.7
FLASH_!WP!-IO2: TP15.P$1 U1.A8 U5.3
FLASH_CLK: TP9.P$1 U1.C8 U1.H2 U5.6
FLASH_PDI-IO0: TP13.P$1 U1.B6 U1.G2 U5.5
FLASH_PDO-IO1: TP14.P$1 U1.A7 U1.G3 U5.2
GND: C1.2 C2.2 C4.P$2 C5.P$2 C6.P$1 C7.P$1 C8.P$2 C9.P$2 C10.2 C11.2 C16.2 C17.2 C18.2 C26.P$2 C27.2 C28.2 C29.2 C30.2 C31.2 C32.2 C33.2 C34.2 C35.2 C36.2 C37.2 C38.2 C39.2 C40.2 C41.2 C44.P$2 C45.P$2 C46.P$2 C47.P$2 C48.P$2 C49.1 C50.2 C51.2 C52.P$2 C53.P$2 C54.P$2 C55.P$2 C56.P$2 C57.P$2 C58.P$2 C59.P$2 C60.2 C61.P$1 C62.P$2 C63.P$2 C64.P$1 C65.P$2 C66.P$2 C67.1 C68.1 C69.2 C70.2 C71.2 C72.2 C73.2 C74.P$2 J1.A1/B12 J1.B1/A12 J1.S1 J1.S2 J1.S3 J1.S4 J2.5 J2.B5 J3.5 J3.B5 J4.1 J4.1SUPP JP4.3 JP5.3 JP6.1 JP9.2 Q2.S R1.2 R2.2 R8.1 R10.1 R15.1 R17.1 R18.2 R19.2 R21.1 R24.1 R29.1 R30.1 R32.2 R102.1 S2.2 S2.7 S2.8 S2.10 S2.12 S2.PAD S3.6 S3.7 S3.PAD U1.B2 U1.B5 U1.B12 U1.D2 U1.H1 U1.H10 U1.J10 U1.K7 U1.L1 U1.L2 U1.L7 U1.L8 U1.M1 U1.M3 U2.10 U2.11 U2.12 U2.14 U2.15 U2.16 U2.17 U2.19 U2.20 U2.24 U2.25 U2.30 U2.39 U2.40 U3.3 U3.7 U3.PAD U4.1 U4.10 U4.11 U4.20 U4.PAD U5.4 U6.2 U6.18 U6.25 VR1.3 VR1.9 VR1.13 VR2.2 VR2.PAD X3.2 X3.4 X4.2 X4.4
LED_SUP: D1.3-A1 D1.4-A2 D2.3-A1 D2.4-A2 JP1.1
N$1: J1.B5 R19.1
N$2: D4.ANODE LS1.- Q2.D
N$8: L1.P$1 U1.A1
N$13: J1.A5 R18.1
N$14: L1.P$2 U1.A2
N$25: JP4.2 U6.6
N$28: R2.1 R3.2
N$33: JP5.2 U6.5
N$42: JP6.2 U6.17
N$47: JP2.1 R21.2
N$49: R102.2 U3.4
N$54: D3.A R6.2
N$64: R22.2 R23.1
N$66: R4.2 R5.1
N$67: JP3.1 R24.2
N$68: JP3.3 RT1.2
N$69: R14.2 RT1.1
N$70: R14.1 R15.2
QI_TS_CTRL: C30.1 JP3.2 U1.F1 U4.13
RF1: A1.FEED S2.9
RF2: A2.FEED S2.3
RF3: A3.FEED S2.1
RFC: C3.P$2 S2.11
RFSW_V1: S2.4 U1.E2
RFSW_V2: S2.5 U1.K5
V1P8_CLEAN: C65.P$1 C74.P$1 U1.B11 VR2.1
V1P8_CLEAN_EN: R28.2 U1.K6 VR2.3
VBAT: C51.1 J4.3 J4.3SUPP JP9.1 S1.2 U3.10
VBAT_SW_FOR_CHGLED: JP7.2 R6.1
VBAT_SWITCHED: C63.P$1 C64.P$2 JP7.1 JP8.1 R31.2 R33.1 R34.1 S1.3 VR1.1 VR1.7
VQI: C29.1 C50.1 C71.1 Q1.A2 Q1.A3 Q1.B3 U3.1 U4.4
VR1_1P8_EN: R34.2 VR1.6
VR1_2P5_EN: R33.2 U1.H9 VR1.12
VR1_FB1: C13.P$1 R9.2 R10.2 VR1.4
VR1_FB2: C12.P$2 R7.1 R8.2 VR1.10
VR1_LX1: L6.P$2 VR1.8
VR1_LX2: L5.P$1 VR1.2
VUSB: C49.2 J1.A4/B9 J1.B4/A9 Q1.B2 Q1.C2 Q1.C3 U4.9

## Tracks (layer width: path | path; a pad name or v marks a point on that pad's centre or on a via)
9DOF_!BOOT_LOAD_PIN  (via drill 0.1 pad 0.05, 0.2)
  Top 0.152: U6.4 40.32,17.14 40.82,16.64 R20.1 41.2,16.61 42.27,16.61 v43.59,17.93 | v51.44,23.55 51.44,23.42 51.03,23.01 50.63,23.01 49.82,22.2 v48.72,22.2 | v44.51,18.85 v44.51,21.29
  Bottom 0.152: U1.D5 50.7,27.57 50.89,27.37 50.89,26.18 51.8,25.28 51.8,23.9 v51.44,23.55 | v44.51,18.85 v43.59,17.93 | v44.51,21.29 44.58,21.36 46.69,21.36 47.53,22.2 v48.72,22.2
  other vias: 50.26,27.57
9DOF_!RESET  (via drill 0.2)
  Top 0.152: 43.16,21.79 43.16,21.21 42.15,20.2 U6.11 41.11,20.2 v39.35,18.44 | 43.16,21.79 43.16,23.49 42.27,24.38 41.03,24.38 40.16,25.25 40.16,27.23 40.75,27.81 v40.75,28.4 | J2.3 42.32,28.4 42.09,28.63 v42.09,28.7 | U1.E1 50.61,25.69 51.09,25.21 51.09,23.96 50.87,23.75 50.58,23.75 49.61,22.78 47.55,22.78 v47.48,22.71 | 43.16,21.79 v42.88,21.79 | v40.27,16.21 40.27,15.09 41.48,13.87 R103.1
  Bottom 0.152: v47.48,22.71 47.48,22.53 46.56,21.62 43.06,21.62 v42.88,21.79 | v39.35,18.44 39.35,16.41 39.55,16.21 v40.27,16.21 | v40.75,28.4 J2.B3 41.79,28.4 v42.09,28.7
9DOF_BL_IND  (via drill 0.1 pad 0.05, 0.2)
  Top 0.152: v42.83,23.27 42.55,22.99 42.55,21.64 v42.83,21.36 | v44.76,30.68 44.6,30.68 43.74,29.83 43.74,24.61 43.59,24.46 43.59,24.17 43.88,23.88 v43.96,23.88 | v43.01,20.57 42.98,20.57 42.11,19.7 U6.10
  Route15 0.152: v50.27,30.99 arc89 50.33,31.04 arc-82 50.6,31.27 arc-90 50.89,31 50.89,29.67 arc-90 50.61,29.39 50.54,29.32 50.54,29.2 50.26,28.92 U1.D6
  Bottom 0.152: v43.96,23.88 43.35,23.27 v42.83,23.27 | v44.76,30.68 45.37,30.68 45.49,30.56 48.93,30.56 49.36,30.99 v50.27,30.99 | v42.83,21.36 43.01,21.18 v43.01,20.57
  other vias: 50.26,27.92
9DOF_CAP
  Top 0.203: U6.9 42.99,19.2 C52.P$1
9DOF_INT  (via drill 0.1 pad 0.05, 0.2)
  Top 0.152: v45.07,30.3 44.61,30.3 44,29.69 44,24.39 v43.92,24.31 | U6.14 41.72,21.7 42.25,22.22 42.25,23.29 v42.57,23.62 42.57,23.7 42.14,24.13 40.9,24.13 38.97,26.06 TP17.P$1
  Route15 0.152: U1.D4 50.31,27.22 50.54,27.45 50.54,28.37 arc-53 51,29.29 arc59 51.15,29.63 51.15,31.01 arc90 50.63,31.53 arc86 49.97,30.92 arc-69 49.61,30.47 arc15 v48.61,30.02
  Bottom 0.152: v48.61,30.02 48.25,30.02 47.97,30.3 v45.07,30.3 | v43.92,24.31 43.23,23.62 v42.57,23.62
  other vias: 50.26,27.22
9DOF_SCL-COM1  (via drill 0.1 pad 0.05, 0.2)
  Top 0.152: U1.E8 50.91,28.62 v50.93,28.63 | v45.07,31.02 44.57,31.02 43.49,29.94 43.49,24.81 v43.29,24.61 | TP18.P$1 37.62,25.04 37.06,24.49 37.06,23.02 R101.2
  Top 0.254: R101.2 38.57,22.96 U6.19 39.32,22.67 40.29,23.65 41.95,23.65 v42.06,23.75
  Route15 0.152: v51.38,31.27 51.4,31.25 51.4,29.55 arc-46 51.17,29.1 arc42 50.93,28.76 v50.93,28.63
  Bottom 0.152: v43.29,24.61 42.92,24.61 v42.06,23.75 | v51.38,31.27 51.36,31.3 49.37,31.3 49.22,31.44 48.83,31.44 48.2,30.81 45.68,30.81 45.47,31.02 v45.07,31.02
9DOF_SDA-COM0  (via drill 0.1 pad 0.05, 0.2)
  Top 0.152: U1.E7 50.7,28.18 50.75,28.18 51.04,27.9 v51.16,27.9 | v50.95,23.41 50.6,23.41 49.72,22.53 47.83,22.53 47.66,22.35 46.97,22.35 v46.89,22.43 | U6.20 38.69,22.2 | TP19.P$1 37.62,23.52 37.83,23.32 38.79,23.32 v39.1,23.01
  Top 0.254: R100.2 37.92,22.2 U6.20 | v39.15,21.69 39.15,21.74 38.69,22.2
  Route15 0.152: v51.16,27.9 51.16,27.32 50.96,27.11 50.96,25.33 51.09,25.2 51.09,23.56 v50.95,23.41
  Bottom 0.152: v46.89,22.43 46.74,22.28 42.88,22.28 42.2,21.59 40.88,21.59 40.37,21.08 39.86,21.08 39.25,21.69 v39.15,21.69 39.1,21.74 v39.1,23.01
9DOF_SWCLK  (via drill 0.2)
  Top 0.152: U6.8 43.15,18.7 43.41,18.96 43.41,23.62 42.4,24.64 41.18,24.64 40.42,25.4 40.42,27.12 41.46,28.16 J2.4 42.07,27.79 43.03,27.79 v43.15,27.91 v43.16,27.91
  Bottom 0.152: v43.16,27.91 42.73,28.34 J2.B4
9DOF_SWDIO  (via drill 0.2)
  Top 0.152: U6.7 43.38,18.2 43.67,18.49 43.67,23.73 42.51,24.89 41.33,24.89 40.67,25.55 40.67,26.57 41.23,27.13 J2.2 40.89,27.13 v40.81,27.05
  Bottom 0.152: J2.B2 42.09,27.76 41.23,27.76 40.81,27.34 v40.81,27.05
9DOF_XI
  Top 0.254: U6.27 37.58,18.7 37.4,18.52 X2.2 36.62,18.72 C6.P$2
9DOF_XO
  Top 0.203: 37.01,19.58 X2.1
  Top 0.254: U6.26 37.39,19.2 37.01,19.58 | X2.1 36.72,19.49 C7.P$2
!AD_EN  (via drill 0.2)
  Top 0.203: U4.8 37.49,7.41 v37.58,7.49 | v36.61,9.3 36.56,9.34 Q1.A1 | Q1.C1 34.71,9.67 34.14,9.67 v34.05,9.58
  Bottom 0.203: v37.58,7.49 37.52,7.55 37.52,8.38 v36.61,9.3 36.18,9.73 34.2,9.73 v34.05,9.58
!CHG  (via drill 0.1 pad 0.05, 0.2)
  Top 0.152: v32.77,2.11 32.7,2.18 v21.47,2.18 | U1.J7 51.67,28.27 v51.62,28.32 | v54.16,24.8 54.06,24.69 54.06,22.76 52.71,21.42 52.71,20.6 52.58,20.47 52.58,13.18 v52.05,12.65
  Top 0.203: U4.7 37.99,7.4 v38.09,7.49 | U3.8 13.39,16.87 v13.21,17.04 13.14,16.97 9.82,16.97 D3.C
  Route15 0.152: v38.09,7.49 38.09,7.04 33.15,2.11 v32.77,2.11
  Bottom 0.152: v38.09,7.49 38.54,7.49 40.14,9.09 40.85,9.09 41.13,9.37 41.13,11.9 41.72,12.5 51.9,12.5 v52.05,12.65 | v21.47,2.18 21.47,8.41 20.86,9.02 20.86,11.66 16.39,16.13 14.13,16.13 v13.21,17.04 | v51.62,28.32 51.64,28.34 53.01,28.34 53.4,27.94 53.7,27.94 53.92,27.72 53.92,27.45 53.64,27.16 53.64,25.88 53.91,25.61 53.91,25.08 54.16,24.83 v54.16,24.8
!DW_RST  (via drill 0.1 pad 0.05, 0.2)
  Top 0.152: U1.D1 50.26,25.74 v50.32,25.68 | v50.38,24.74 50.38,23.95 49.46,23.04 46.89,23.04 v46.67,22.81 | v40.44,24.08 40.29,24.08 39.88,23.67 38.06,23.67 v38.03,23.65 | v31.93,24.23 31.68,23.98 29.52,23.98 28.58,23.04 v28.48,23.04 | v26.85,23.22 25.74,23.22 25.62,23.1 U2.33
  Bottom 0.152: v50.32,25.68 50.38,25.63 v50.38,24.74 | v46.67,22.81 46.54,22.94 42.4,22.94 41.31,24.03 40.49,24.03 v40.44,24.08 | v31.93,24.23 31.93,24.43 32.11,24.61 34.73,24.61 35.7,23.65 v38.03,23.65 | v28.48,23.04 27.03,23.04 v26.85,23.22
!DW_SPI_CS  (via drill 0.1 pad 0.05, 0.2)
  Top 0.152: U2.37 24.02,23.31 23.3,24.03 23.3,24.74 TP_DW_SPI_CS.TP 23.5,25.55 26.96,25.55 27.03,25.48 29.85,25.48 v31.04,26.67 | U1.F4 50.96,27.26 51.26,27.56 v51.57,27.56 | v55.65,33.06 55.65,33.19 55.58,33.26 55.36,33.26 53.56,35.05 48,35.05 45.81,32.87 40.42,32.87 39.4,31.85 39.4,28.96 39.35,28.91 39.35,28.32 38.72,27.7 36.18,27.7 v36.12,27.64
  Route15 0.152: v51.57,27.56 51.87,27.56 52.2,27.23 52.9,27.23 54.44,28.77 54.44,29.36 55.02,29.94 55.02,30.27 v55.51,30.76
  Bottom 0.152: v55.51,30.76 55.72,30.98 55.72,33 55.67,33.06 v55.65,33.06 | v31.04,26.67 31.17,26.54 31.73,26.54 32.19,27 35.44,27 36.07,27.64 v36.12,27.64
!PG  (via drill 0.1 pad 0.05, 0.2)
  Top 0.152: v54.41,24.43 54.31,24.33 54.31,22.61 53.09,21.39 53.09,21.01 v53.04,20.95 | v52.13,20.85 52.08,20.8 52.08,15.08 v51.92,14.92
  Top 0.203: v16.29,18.08 16.29,18.04 15.92,17.67 U3.5
  Route15 0.203: v17.51,15.85 16.8,16.56 16.8,17.64 16.35,18.08 v16.29,18.08
  Bottom 0.152: v17.51,15.85 17.71,15.65 17.71,15.44 21.16,11.99 21.16,9.14 23.45,6.86 29.8,6.86 30.61,6.05 37.52,6.05 40.27,8.79 41.08,8.79 41.43,9.14 41.43,11.78 41.85,12.19 52.1,12.19 52.41,12.5 52.41,14.44 v51.92,14.92 | U1.K8 52.36,28.68 52.58,28.91 52.82,28.91 53.53,28.19 53.81,28.19 54.17,27.83 54.17,27.34 53.89,27.06 53.89,26.03 54.57,25.36 54.57,24.59 v54.41,24.43 | v53.04,20.95 52.23,20.95 v52.13,20.85
  other vias: 52.36,28.62
+1V8  (via drill 0.1 pad 0.05, 0.1 pad 0.2, 0.2)
  Top 0.152: J2.1 43.14,26.72 v43.14,26.42 | U1.B1 49.56,25.47 C44.P$1 | C46.P$1 54.42,28.88 54.19,29.11 53.22,29.11 53.07,28.97 U1.M9 | U1.M10 53.06,29.33 53.12,29.39 54.19,29.39 C45.P$1 | C58.P$1 52.15,25.28 51.31,26.12 U1.G1 | C44.P$1 v49.64,25.01 v49.64,25.02 | C58.P$1 52.16,25.01 | C44.P$1 49.69,24.69 v49.64,24.69 | J3.1 v66.4,10.77 | C58.P$1 52.3,25.01 52.51,24.81 v52.51,24.75 | C58.P$1 52.3,25.01 52.49,25.21 v52.49,25.36 | R103.2 v39.55,13.87
  Top 0.203: R9.1 11.34,32.84 C13.P$2 11.24,33.88 10.8,33.88 10.6,33.68 10.6,33.27 v10.7,33.17 | R101.1 R100.1 35.79,21.29 v36.38,20.7 | R20.2 41.66,15.37 41.89,15.6 v41.89,15.9 | C31.1 37.24,16.94 v37.01,16.71 | R16.2 43.64,14.3 v43.82,14.48 | v50.61,30.99 50.61,31.11 50.71,31.22 C59.P$1 50.66,31.37 50.27,31.77 v50.27,31.9
  Top 0.254: U6.28 38.12,18.2 C31.1 | v48.39,26.87 48.19,26.67 C47.P$1 48.06,26.75 | 48.06,26.75 v48.06,27.08 | v47.73,27.08 48.06,26.75 | v51.15,31.92 51.15,31.72 50.8,31.37 C59.P$1
  Top 0.279: U2.29 27.49,21.16 27.95,21.62 27.95,23.67 C41.1
  Top 0.305: S3.4 24.55,26.64 24.44,26.74 C68.2 22.92,26.74 v22.69,26.97 v22.69,27.48 | C41.1 28.15,23.8 v29.09,24.74 | U5.8 45.35,20.91 45.04,21.22 C35.1 44.91,21.95 v44.51,21.95 | v54.69,28.3 54.69,28.31 54.42,28.58 C46.P$1 | C45.P$1 54.42,29.41 54.7,29.13 v54.88,29.13
  Route15 0.203: v11.41,30.43 13.95,27.89 v13.95,23.83 | U1.E11 v50.61,30.99
  Route15 0.254: U1.C4 48.74,27.22 v48.39,26.87
  Route15 0.305: v29.09,24.74 29.39,25.04 29.39,26.77
  Route15 0.813: 27.82,28.09 30.97,24.94 37.14,24.94 37.67,24.41
  Bottom 0.152: J2.B1 41,26.67 v41,26.42 | J3.B1 v62.97,10.77
  Bottom 0.203: v10.7,33.17 10.9,33.17 11.11,32.97 11.11,30.63 11.31,30.43 v11.41,30.43 | v41.89,15.9 JP5.1 41.94,17.17 JP4.1
  Bottom 0.305: JP1.2 60.56,35.18 60.02,34.65 v59.82,34.65
  other vias: 11.82,23.83 11.82,23.32 12.53,23.83 12.53,23.32 13.24,23.83 13.24,23.32 13.95,23.32 50.61,29.67 49.91,27.22
  pour Top (isolate 0.102, no thermals): 9.74,24.61 10.67,24.61 10.67,27.13 9.97,27.13 9.89,27.12 9.82,27.09 9.77,27.05 9.72,26.99 9.59,26.77 9.49,26.52 9.43,26.27 9.41,26.02 9.41,26.02 9.4,26 9.4,25.98 9.4,25.98 9.39,25.89 9.39,25.88 9.39,25.87 9.39,25.86 9.38,25.85 9.35,25.76 9.35,25.75 9.35,25.74 9.34,25.73 9.34,25.72 9.29,25.63 9.29,25.63 9.28,25.62 9.28,25.61 9.27,25.6 9.21,25.53 9.21,25.52 9.2,25.51 9.19,25.5 9.19,25.5 9.16,25.47 9.15,25.45 9.14,25.45 9.14,25.45 9.13,25.44 9.08,25.41 9.07,25.41 9.07,25.4 9.06,25.4 9.05,25.4 9,25.38 8.99,25.38 8.98,25.38 8.97,25.38 8.96,25.38 8.92,25.38 8.92,25.37 8.9,25.37 8.88,25.37 8.88,25.37 7.6,25.37 7.6,24.74 8.88,24.74 8.88,24.74 8.9,24.74 8.92,24.74 8.92,24.74 9.07,24.73 9.08,24.73 9.09,24.73 9.1,24.73 9.11,24.72 9.25,24.69 9.25,24.69 9.27,24.69 9.29,24.68 9.29,24.68 9.51,24.63
  pour Route15 (rank 2): 39.91,36.93 39.91,28.17 38.96,27.23 34.86,27.23 34.86,11.79 55.46,11.79 55.46,11.79 55.48,11.79 55.5,11.79 55.5,11.79 55.5,11.79 55.51,11.77 55.53,11.76 55.53,11.76 60,7.21 67.98,7.21 67.98,15.33 67.3,15.98 63.34,15.98 63.33,15.98 63.32,15.98 63.3,15.98 63.29,15.98 62.86,16 62.86,16 62.84,16 62.83,16 62.82,16 62.4,16.09 62.4,16.09 62.38,16.09 62.36,16.09 62.36,16.1 61.95,16.24 61.95,16.24 61.93,16.25 61.92,16.25 61.92,16.26 61.53,16.46 61.53,16.46 61.52,16.47 61.5,16.47 61.5,16.48 61.15,16.73 61.14,16.73 61.13,16.74 61.12,16.75 61.12,16.75 60.81,17.05 60.8,17.05 60.79,17.07 60.78,17.08 60.78,17.08 60.51,17.42 60.51,17.42 60.5,17.44 60.49,17.45 60.49,17.46 60.28,17.83 60.27,17.83 60.27,17.85 60.26,17.86 60.26,17.87 60.1,18.27 60.1,18.27 60.09,18.29 60.09,18.3 60.09,18.31 59.99,18.73 59.98,18.73 59.98,18.75 59.98,18.76 59.98,18.77 59.94,19.2 59.94,19.2 59.94,19.22 59.94,19.24 59.94,19.24 59.95,20.53 59.95,20.53 59.95,20.55 59.96,20.57 59.96,20.57 59.99,21.03 59.99,21.03 59.99,21.05 59.99,21.06 59.99,21.07 60.09,21.51 60.09,21.52 60.1,21.53 60.1,21.55 60.1,21.55 60.26,21.98 60.26,21.98 60.27,22 60.28,22.01 60.28,22.01 60.5,22.41 60.5,22.42 60.51,22.43 60.51,22.45 60.52,22.45 60.79,22.81 60.79,22.82 60.8,22.83 60.81,22.84 60.82,22.84 61.14,23.16 61.14,23.17 61.15,23.18 61.17,23.19 61.17,23.19 61.53,23.46 61.54,23.47 61.55,23.48 61.57,23.49 61.57,23.49 61.97,23.7 61.97,23.71 61.99,23.71 62,23.72 62.01,23.72 62.43,23.88 62.43,23.88 62.45,23.89 62.47,23.89 62.47,23.89 62.92,23.99 62.92,23.99 62.94,23.99 62.95,24 62.96,23.99 63.41,24.03 63.41,24.03 63.43,24.03 63.45,24.03 63.45,24.03 67.09,24.03 67.26,24.04 67.44,24.09 67.6,24.16 67.74,24.27 67.87,24.39 67.97,24.54 68.04,24.7 68.09,24.87 68.1,25.04 68.1,31.85 60.64,31.85 60.61,31.88 60.61,36.93
  pour Top (isolate 0.102, no thermals): 14.34,24.12 9.07,24.12 8.86,24.33 8.86,25.03 7.56,25.03 7.56,23.73 8.27,23.03 14.34,23.03
  pour Route15 (rank 2): 29.45,30.28 20.68,30.28 14.58,24.18 11.56,24.18 11.56,22.96 15.86,22.96 19.72,26.82 29.45,26.82
+2V5  (via drill 0.2)
  Top 0.203: R7.2 16.27,27.13 C12.P$1 16.59,27.11 17.41,27.92 18.76,27.92 20.45,29.62 20.45,34.9 v20.66,35.1 | U6.3 39.82,16.39 C32.1
  Top 0.254: S2.6 36.71,13.23 C34.1 36.99,13.33 37.32,13.67 37.32,14.88 35.97,16.23 | 35.97,16.23 34.98,17.22 34.98,27.74 v35.08,27.84 | C32.1 35.97,16.23 | v48.95,36.22 46.74,36.22 R28.1
  Top 0.305: S3.1 24.77,28.14 24.14,28.78 C67.2 | VR2.4 40.88,35.29 40.16,36
  Top 0.356: 40.16,36 C66.P$1
  Top 0.508: C66.P$1 39.16,36 v39.07,35.92
  Top 0.559: C67.2 22.31,28.78
  Top 0.61: 22.31,28.78 21.27,29.82 v21.27,35.1
  Route15 0.203: v48.95,36.22 48.95,35
  Route15 0.254: v35.08,27.84 35.08,27.18
  Route15 0.813: v20.66,35.1 20.66,36.22 28.07,36.22 29.39,34.9 29.39,28.63 30.23,27.79 32.29,27.79 32.9,27.18 35.08,27.18 35.59,27.18 36.1,26.67 37.45,26.67 39.35,28.57 39.35,33.58 40.77,35 | 40.77,35 48.95,35 51.8,35 52.56,35.76 60.03,35.76 61.7,34.09 v62.21,34.09 v62.82,34.09 | 40.77,35 39.86,35.92 v39.07,35.92
  Bottom 0.305: v62.21,34.09 62.21,33.99 61.58,33.35 JP8.3 61.78,33.35 62.52,34.09 v62.82,34.09
  other vias: 19.74,35.51 20.05,35.1 20.35,35.51 20.96,35.51
  pour Top (isolate 0.102, no thermals): 16.11,33.12 16.84,33.12 16.91,33.13 16.96,33.14 17.01,33.17 17.05,33.21 17.15,33.37 17.22,33.54 17.26,33.72 17.28,33.9 17.28,33.9 17.28,33.92 17.28,33.94 17.28,33.94 17.3,34.14 17.3,34.15 17.3,34.16 17.3,34.17 17.31,34.18 17.36,34.39 17.36,34.4 17.37,34.41 17.37,34.42 17.38,34.43 17.47,34.62 17.48,34.63 17.48,34.64 17.49,34.65 17.49,34.65 17.62,34.83 17.63,34.83 17.64,34.84 17.64,34.85 17.65,34.85 17.68,34.88 17.69,34.89 17.7,34.9 17.71,34.9 17.72,34.91 17.76,34.93 17.76,34.94 17.77,34.94 17.78,34.95 17.79,34.95 17.83,34.96 17.84,34.97 17.85,34.97 17.86,34.97 17.87,34.97 17.91,34.97 17.92,34.98 17.93,34.98 17.95,34.98 17.95,34.98 21.47,34.98 21.47,35.61 17.96,35.61 17.95,35.61 17.94,35.61 17.92,35.61 17.92,35.61 17.36,35.64 17.36,35.64 16.82,35.66 16.11,35.66
  pour Route15 (isolate 0.102, no thermals): 19.55,34.81 21.56,34.81 21.56,35.8 19.55,35.8
AP4_!RESET  (via drill 0.2)
  Top 0.152: J3.3 64.69,12.69 63.77,12.69 62.03,14.43 v61.83,14.43 61.73,14.43 59.67,16.48 59.67,18.29 v59.62,18.34 | U1.A6 48.92,27.92 v48.47,28.37 | v46.26,29.24 46.13,29.36 45.73,29.36 45.27,28.9 45.27,24.92 46.01,24.18 46.01,22.48 46.66,21.82 48.26,21.82 48.85,21.23 48.85,20.68 49.56,19.96 v50.63,19.96 | v53.5,19.96 53.5,19.13 53.98,18.64 v58.43,18.64
  Bottom 0.152: 64.06,12.4 62.03,14.43 v61.83,14.43 | v48.47,28.37 48.47,28.7 48.06,29.11 46.74,29.11 46.62,29.24 v46.26,29.24 | v58.43,18.64 59.31,18.64 v59.62,18.34 | v53.5,19.96 v50.63,19.96
  Bottom 0.203: 64.06,12.4 J3.B3
AP4_LED1_GREEN  (via drill 0.1 pad 0.05, 0.2)
  Top 0.152: v53.89,30.31 53.89,30.33 54.12,30.56 54.39,30.56 54.46,30.48 57.18,30.48 57.41,30.71 57.41,32.13 58.58,33.3 59.14,33.3 59.39,33.55 v59.39,34.75 59.39,34.8 59.67,35.08 60.15,35.08 R12.2 | v58.91,36.42 58.91,36.12 58.4,35.61 TP10.P$1
  Bottom 0.152: U1.K10 52.36,29.37 52.59,29.6 53,29.6 53.71,30.31 v53.89,30.31 | v58.91,36.42 58.91,34.9 59.06,34.75 v59.39,34.75
  other vias: 52.36,29.32
AP4_LED1_RED  (via drill 0.1 pad 0.05, 0.1 pad 0.2)
  Top 0.152: v52.97,30.6 53.01,30.6 53.78,31.37 56.8,31.37 57.16,31.72 57.16,32.26 58.45,33.55 58.88,33.55 59.06,33.73 59.06,35.41 TP20.P$1 59.27,35.81 59.98,36.53 60.71,36.53 R11.2
  Bottom 0.152: U1.C10 49.91,29.72 50.39,30.2 51.42,30.2 51.83,30.6 v52.97,30.6
  other vias: 49.91,29.32
AP4_LED2_BLUE_COMM  (via drill 0.2)
  Top 0.152: v61.25,35.48 60.89,35.48 R11.1 | v61.68,36.47 61.73,36.53 63.69,36.53 D1.1-C1
  Route15 0.152: v61.25,35.48 61.25,35.89 61.68,36.32 v61.68,36.47
AP4_LED2_RED  (via drill 0.1 pad 0.05, 0.2)
  Top 0.152: v53.68,29.89 53.77,29.97 57.44,29.97 57.92,30.45 57.92,31.8 58.71,32.59 v58.78,32.59 58.88,32.69 59.27,32.69 59.57,32.38 60.1,32.38 60.33,32.61 R25.2 | TP11.P$1 57.03,35.61 57.49,35.15 v57.49,35.08
  Route15 0.152: v53.68,29.89 53.16,29.89 52.94,29.67 U1.J11
  Bottom 0.152: v57.49,35.08 58.35,34.21 58.35,33.02 v58.78,32.59
  other vias: 52.01,29.67
AP4_LED2_YELLOW  (via drill 0.1 pad 0.05, 0.2)
  Top 0.152: v54.23,30.27 54.28,30.23 57.31,30.23 57.66,30.58 57.66,32 58.71,33.05 59.26,33.05 59.95,33.73 R26.2 60.31,33.73 v59.87,34.16 | TP12.P$1 56.44,36.55 58.35,36.55 v58.48,36.42
  Bottom 0.152: v54.23,30.27 54.23,30.04 53.8,29.61 53.74,29.61 53.44,29.32 U1.L10 | v58.48,36.42 58.48,34.75 58.94,34.29 59.62,34.29 59.75,34.16 v59.87,34.16
  other vias: 52.71,29.32
AP4_LED_BLUE_COMM
  Top 0.152: D2.2-C2 61.38,33.57 R26.1
AP4_LED_GREEN_COMM
  Top 0.152: D2.1-C1 63.63,33.57 63.13,33.07 61.68,33.07 R25.1
AP4_LED_RED_COMM
  Top 0.152: D1.2-C2 61.52,34.87 R12.1
AP4_LPADC_VREF
  Top 0.203: C26.P$1 48.57,30.58 49.13,30.02 U1.A12
AP4_RFIOP
  Top 0.152: U1.M2 53.19,26.52 53.21,26.54 53.58,26.54 53.73,26.7 C2.1
  Top 0.254: L3.2
  Top 0.533: C2.1 L3.2
AP4_SWDCLK  (via drill 0.1 pad 0.05, 0.2)
  Top 0.152: J3.4 63.76,12.04 62.01,13.79 | v62.01,13.82 61.91,13.92 61.7,13.92 59.27,16.36 59.27,20.6 55.89,23.98 v54.92,23.98
  Top 0.203: v62.01,13.82 62.01,13.79
  Bottom 0.152: J3.B4 64.71,11.42 63.83,11.42 62.01,13.24 v62.01,13.82 | U1.K3 52.43,26.8 52.43,26.17 arc90 52.71,25.89 52.91,25.89 53.4,25.39 53.4,24.54 53.96,23.98 v54.92,23.98
  other vias: 52.36,26.87
AP4_SWDIO  (via drill 0.1 pad 0.05, 0.2)
  Top 0.152: v64.24,8.59 arc-90 63.63,9.19 63.63,10.31 64.06,10.74 | 64.06,11.13 59.01,16.18 59.01,20.47 55.94,23.55 v54.92,23.55
  Top 0.203: 64.06,10.74 J3.2 64.06,11.13
  Bottom 0.152: v64.24,8.59 65.16,8.59 arc90 65.77,9.19 65.77,10.34 J3.B2 | U1.J3 52.01,26.79 52.15,26.65 52.15,26.16 arc90 52.68,25.63 52.8,25.63 53.14,25.29 53.14,24.43 54.03,23.55 v54.92,23.55
  other vias: 52.01,26.87
AP4_VDDBH  (via drill 0.2)
  Top 0.152: C48.P$1 52.86,25.55 52.53,25.89 52.22,25.89 52.01,26.1 U1.J1
  Top 0.241: U1.G12 51.31,30.73
  Top 0.254: 51.31,30.73 51.76,31.18 L2.2 | 53.02,25.01 C48.P$1
  Top 0.279: 53.3,24.74 53.02,25.01
  Top 0.305: C60.1 51.72,32.02 L2.2 | C60.1 51.59,33.15 v51.19,33.15 | C60.1 51.62,33.27 51.31,33.58 v51.19,33.58 | 53.3,24.74 53.3,24.64 53.47,24.46 v53.47,23.11
  Bottom 0.305: v51.19,33.58 v51.19,33.15 51.19,33.55 53.08,35.45 55.81,35.45 56.69,34.57 56.69,34.16 56.57,34.04 56.57,27.86 56.32,27.61 56.32,24.97 55.33,23.98 55.33,23.37 55.07,23.11 v53.47,23.11
AP4_VDDBH_SW
  Top 0.254: U1.H12 51.66,30.14 53.06,31.54 L2.1
AP4_VDDC
  Top 0.229: U1.A3 48.9,26.87 48.49,26.47 48.49,25.68 C55.P$1
AP4_VDDC_LV  (via drill 0.1 pad 0.05)
  Top 0.254: C56.P$1 48.06,26.03 v47.78,26.31
  Bottom 0.254: U1.B3 49.44,26.87 48.89,26.31 v47.78,26.31
  other vias: 49.56,26.87
AP4_VDDF  (via drill 0.1 pad 0.2)
  Top 0.152: C57.P$1 51.44,25.24 v51.33,25.35
  Bottom 0.152: U1.C2 49.91,26.45 50.14,26.23 50.46,26.23 v51.33,25.35
  other vias: 49.91,26.52
AP4_VDDS
  Top 0.152: U1.C1 49.91,25.68 50.58,25.01 C54.P$1
AP4_XI
  Top 0.203: U1.A4 48.64,27.22 48.34,27.51 X1.2 47.5,27.48 C8.P$1
AP4_XI32M
  Top 0.203: U1.C12 49.91,30.23 49.41,30.73 48.86,30.73 48.32,31.27 X3.1 C4.P$1
AP4_XO
  Top 0.203: U1.A5 48.74,27.57 47.73,28.57 X1.1 46.46,28.57 C9.P$1
AP4_XO32M
  Top 0.203: U1.D12 50.26,30.57 49.89,30.93 49.89,32.08 49.62,32.35 X3.3 49.28,32.4 C5.P$1
BATIN  (via drill 0.1 pad 0.05, 0.2)
  Top 0.152: v51.71,28.64 51.48,28.64 51.09,28.26 v51.09,28.24 | v55.13,35.04 55.59,35.04 C27.1 R30.2
  Top 0.203: R31.1 57.92,34.7 57.05,34.7 R30.2
  Route15 0.152: v53.91,30.75 54.11,30.56 54.35,30.56 54.51,30.39 54.51,30.15 53.69,29.34 53.13,29.34 52.7,28.91 52.25,28.91 51.99,28.64 v51.71,28.64 | U1.D3 50.34,26.87 50.88,27.41 50.88,28.04 v51.08,28.24 v51.09,28.24
  Bottom 0.152: v53.91,30.75 53.86,30.8 53.86,30.97 54.44,31.54 54.44,32.18 53.76,32.86 53.76,33.61 55.13,34.97 v55.13,35.04
  other vias: 50.26,26.87
BATT_THERM  (via drill 0.2)
  Top 0.203: v3.26,12.65 5.52,12.65 6.23,13.36 6.23,13.89 10.6,16.41 11.41,16.41 v11.51,16.51
  Bottom 0.203: J4.2SUPP v3.26,12.65 J4.2 | v11.51,16.51 JP2.3
BATT_TS  (via drill 0.2)
  Top 0.203: U3.9 13.15,16.47 v13.05,16.56
  Bottom 0.203: v13.05,16.56 12.53,17.09 JP2.2
BLE_ANT_FEED
  Top 0.254: C1.1 A4.S1
  Top 0.533: L3.1 C1.1
  pour Top (no thermals): 57.98,26.46 57.99,26.47 58,26.47 58,26.47 58,26.47 58,26.47 58,26.47 58,26.47 58,26.47 58,26.47 58,26.47 58,26.47 58,26.47 58,26.47 58,26.47 58,26.47 58,26.47 57.99,26.47 57.97,26.47 57.97,26.47 57.97,26.47 57.97,26.47 57.97,26.47 57.97,26.47 57.97,26.47 57.97,26.47 57.97,26.47 57.97,26.47 57.97,26.47 57.97,26.47 57.97,26.47 57.97,26.47 57.97,26.47 57.97,26.47 57.97,26.47 57.98,26.46 57.98,26.46 57.98,26.46 57.98,26.46
BQ_AC1
  pour Top (rank 2, no thermals): 41.48,6.51 41.48,5.23 44.02,5.23 44.04,5.22 45.14,4.11 46.16,4.11 46.16,7.87 40.27,7.87 40.27,6.53 41.47,6.53
BQ_AC2
  pour Top (rank 2, no thermals): 41.48,5.03 41.48,3.98 41.47,3.96 40.27,3.96 40.27,2.29 46.26,2.29 46.39,2.29 46.52,2.32 46.64,2.37 46.74,2.44 46.83,2.54 46.9,2.65 46.95,2.77 46.97,2.9 46.97,3.2 46.96,3.34 46.92,3.47 46.85,3.6 46.76,3.7 46.66,3.79 46.53,3.86 46.4,3.9 46.26,3.91 45.04,3.91 43.92,5.03
BQ_BOOT1
  Top 0.254: U4.3 39.99,7.09 40.42,7.52 42.07,7.52 C19.1
BQ_BOOT2
  Top 0.254: U4.17 39.49,3.16 40.06,2.59 41.82,2.59 C20.1
BQ_CLAMP1
  Top 0.254: U4.5 38.99,7.34 39.66,8 42.81,8 C42.1
BQ_CLAMP2
  Top 0.254: U4.16 38.99,3.16 39.91,2.24 41.97,2.24 42.05,2.31 42.76,2.31 C43.1
BQ_COMM1
  Top 0.254: U4.6 38.49,7.34 39.51,8.36 43.31,8.36 44.18,7.49 C24.1
BQ_COMM2
  Top 0.254: C25.1 43.62,1.96 42.2,1.96 42.12,1.88 39.77,1.88 38.49,3.15 U4.15
BQ_FOD  (via drill 0.2)
  Top 0.152: R3.1 47.6,1.45 v47.07,1.98
  Top 0.203: U4.14 37.99,3.01 v38.03,2.97 | v44.56,1.98 R23.2 | R5.2 46.99,1.98 v47.07,1.98
  Bottom 0.203: v38.03,2.97 38.46,2.97 39.96,1.47 44.05,1.47 v44.56,1.98 45.07,1.47 46.56,1.47 v47.07,1.98
BQ_ILM  (via drill 0.2)
  Top 0.203: U4.12 36.99,2.99 v37.01,2.97 | v45.24,2.03 R4.1